# EAGLE board climbing_WS2812 (EAGLE 6.3)
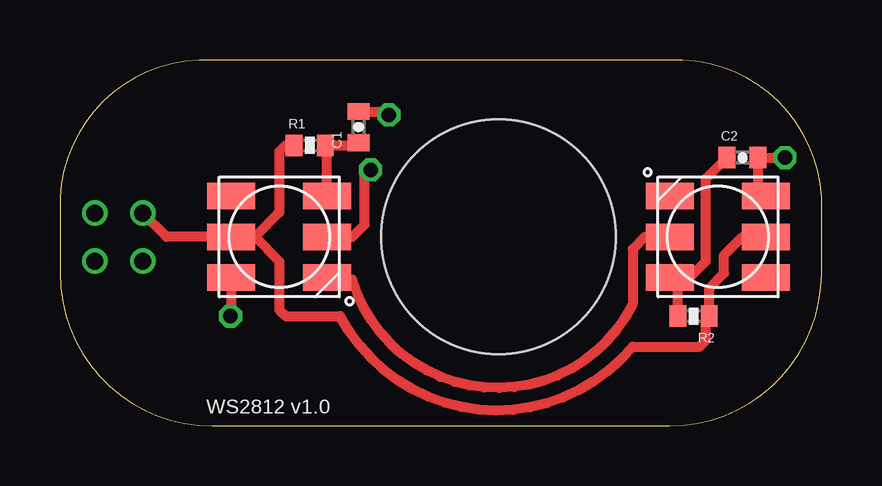
[diagram p0: board, top side]
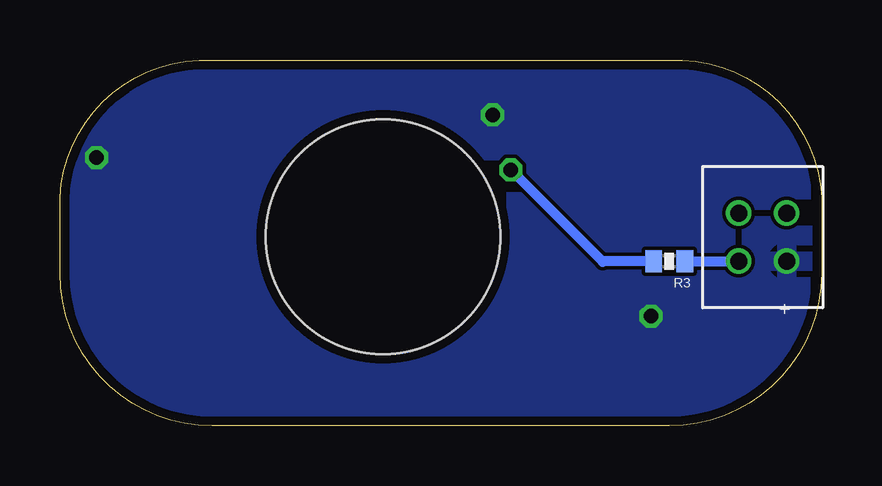
[diagram p1: board, bottom side, seen from below]

Size 31.75 x 15.24 mm. Coordinates in mm from the lower left corner, seen from the top.
Outline: 0,9.53 0,6.35 arc90 6.35,0 25.4,0 arc90 31.75,6.35 31.75,9.53 arc90 25.4,15.24 6.35,15.24 arc90 0,9.53
Copper layers (1*16): Top 0.0356mm / dielectric 1.5011mm / Bottom 0.0356mm
Design rules "LaenPCBOrder": minimum track width 6mil, minimum drill 13mil, track to track 6mil, track to pad 6mil, pad to pad 6mil, via to via 6mil, smd to smd 6mil, copper to edge 15mil, drill to drill 6mil, minimum pad ring 7mil, minimum via ring 7mil, stop-mask expansion 4mil, vias tented up to drill 0mil, thermal gap 10mil
Holes 9.78 mm at 18.29,7.87

## Footprints (pad centres in the part's own frame; a part is rotated, then mirrored left to right if it is on the bottom)
0402-CAP = smd 0.7 x 0.9: 1 -0.65,0; 2 0.65,0
0402-RES = smd 0.7 x 0.9: 1 -0.65,0; 2 0.65,0
SWR204 = drill 0.7: P$1 -0.99,0.96; P$2 -0.99,-1.04; P$3 1.01,-1.04; P$4 1.01,0.96
RGBLED5050 = smd 2 x 1.1: 1 -2,1.7; 2 -2,0; 3 -2,-1.7; 4 2,-1.7; 5 2,0; 6 2,1.7

## Placement (x,y rotation side)
C1  .1uF  [0402-CAP]  12.45,12.45 90 top
C2  .1uF  [0402-CAP]  28.45,11.18 0 top
R1  150  [0402-RES]  10.41,11.68 0 top
R2  150  [0402-RES]  26.42,4.57 180 top
R3  22  [0402-RES]  6.35,6.86 180 bottom
U$1  SWR204-D02  [SWR204]  2.41,7.87 270 bottom
U$2  WS2812  [RGBLED5050]  9.14,7.87 0 top
U$3  WS2812  [RGBLED5050]  27.43,7.87 180 top

## Library data of the parts
C1 C2 R1-R3 = SparkFun-Passives
U$1 = SparkFun-Connectors
U$2 U$3 = adafruit

## Nets
DI: R3.2 U$2.5
DODI: U$2.4 U$3.5
GND: C1.2 C2.2 U$1.P$4 U$2.3 U$3.3
N$1: R3.1 U$1.P$3
VCC: C1.1 R1.2 U$2.6
VCC2: C2.1 R2.2 U$3.6
VDD: R1.1 R2.1 U$1.P$2 U$2.2 U$3.2

## Tracks (layer width: path | path; a pad name or v marks a point on that pad's centre or on a via)
DI  (via drill 0.6)
  Top 0.406: U$2.5 12.19,7.87 12.7,8.38 12.7,10.41 v12.95,10.67
  Bottom 0.406: v12.95,10.67 9.12,6.83 9.1,6.86 R3.2
DODI
  Top 0.406: U$2.4 11.22,6.1 12.19,6.1 arc137 23.88,5.08 23.88,7.37 24.38,7.87 U$3.5
GND  (via drill 0.6)
  Top 0.406: v30.23,11.18 C2.2 29.1,9.91 U$3.3 | U$2.3 7.14,4.6 v7.11,4.57 | C1.2 13.57,13.1 v13.72,12.95
  pour Bottom (rank 6): 31.75,9.53 31.75,6.35 arc-90 25.4,0 6.35,0 arc-90 0,6.35 0,9.53 arc-90 6.35,15.24 25.4,15.24 arc-90
N$1
  Bottom 0.406: R3.1 U$1.P$3
VCC
  Top 0.406: U$2.6 11.14,11.6 R1.2 12.33,11.68 C1.1
VCC2
  Top 0.406: R2.2 25.77,5.84 U$3.6 26.24,6.17 26.92,6.86 26.92,10.3 C2.1
VDD
  Top 0.406: R1.1 9.4,11.68 9.14,11.43 9.14,8.89 8.13,7.87 | 8.13,7.87 U$2.2 4.44,7.87 U$1.P$2 | R2.1 27.07,5.73 27.69,6.35 27.69,7.11 28.45,7.87 U$3.2 | 8.13,7.87 9.14,6.86 9.14,4.83 9.4,4.57 11.68,4.57 arc112 23.88,3.3 26.67,3.3 26.92,3.56 26.92,4.43 R2.1 | 27.18,4.32 27.18,4.71 R2.1

## Text on the board
tNames: WS2812 v1.0
bNames: +